# Altium PCB tcpcontrol.pcbdoc (part 1 of 2)
Units mil, origin at the board's own origin, x right, y up, seen from the top; angles counter-clockwise.
Board outline 4775.59 x 3409.45 mil, 2 copper layers (Top Layer, Bottom Layer); 217 components, 170 nets, 747 pads, 138 vias.
Unrouted connection lines stored in the file: 74.
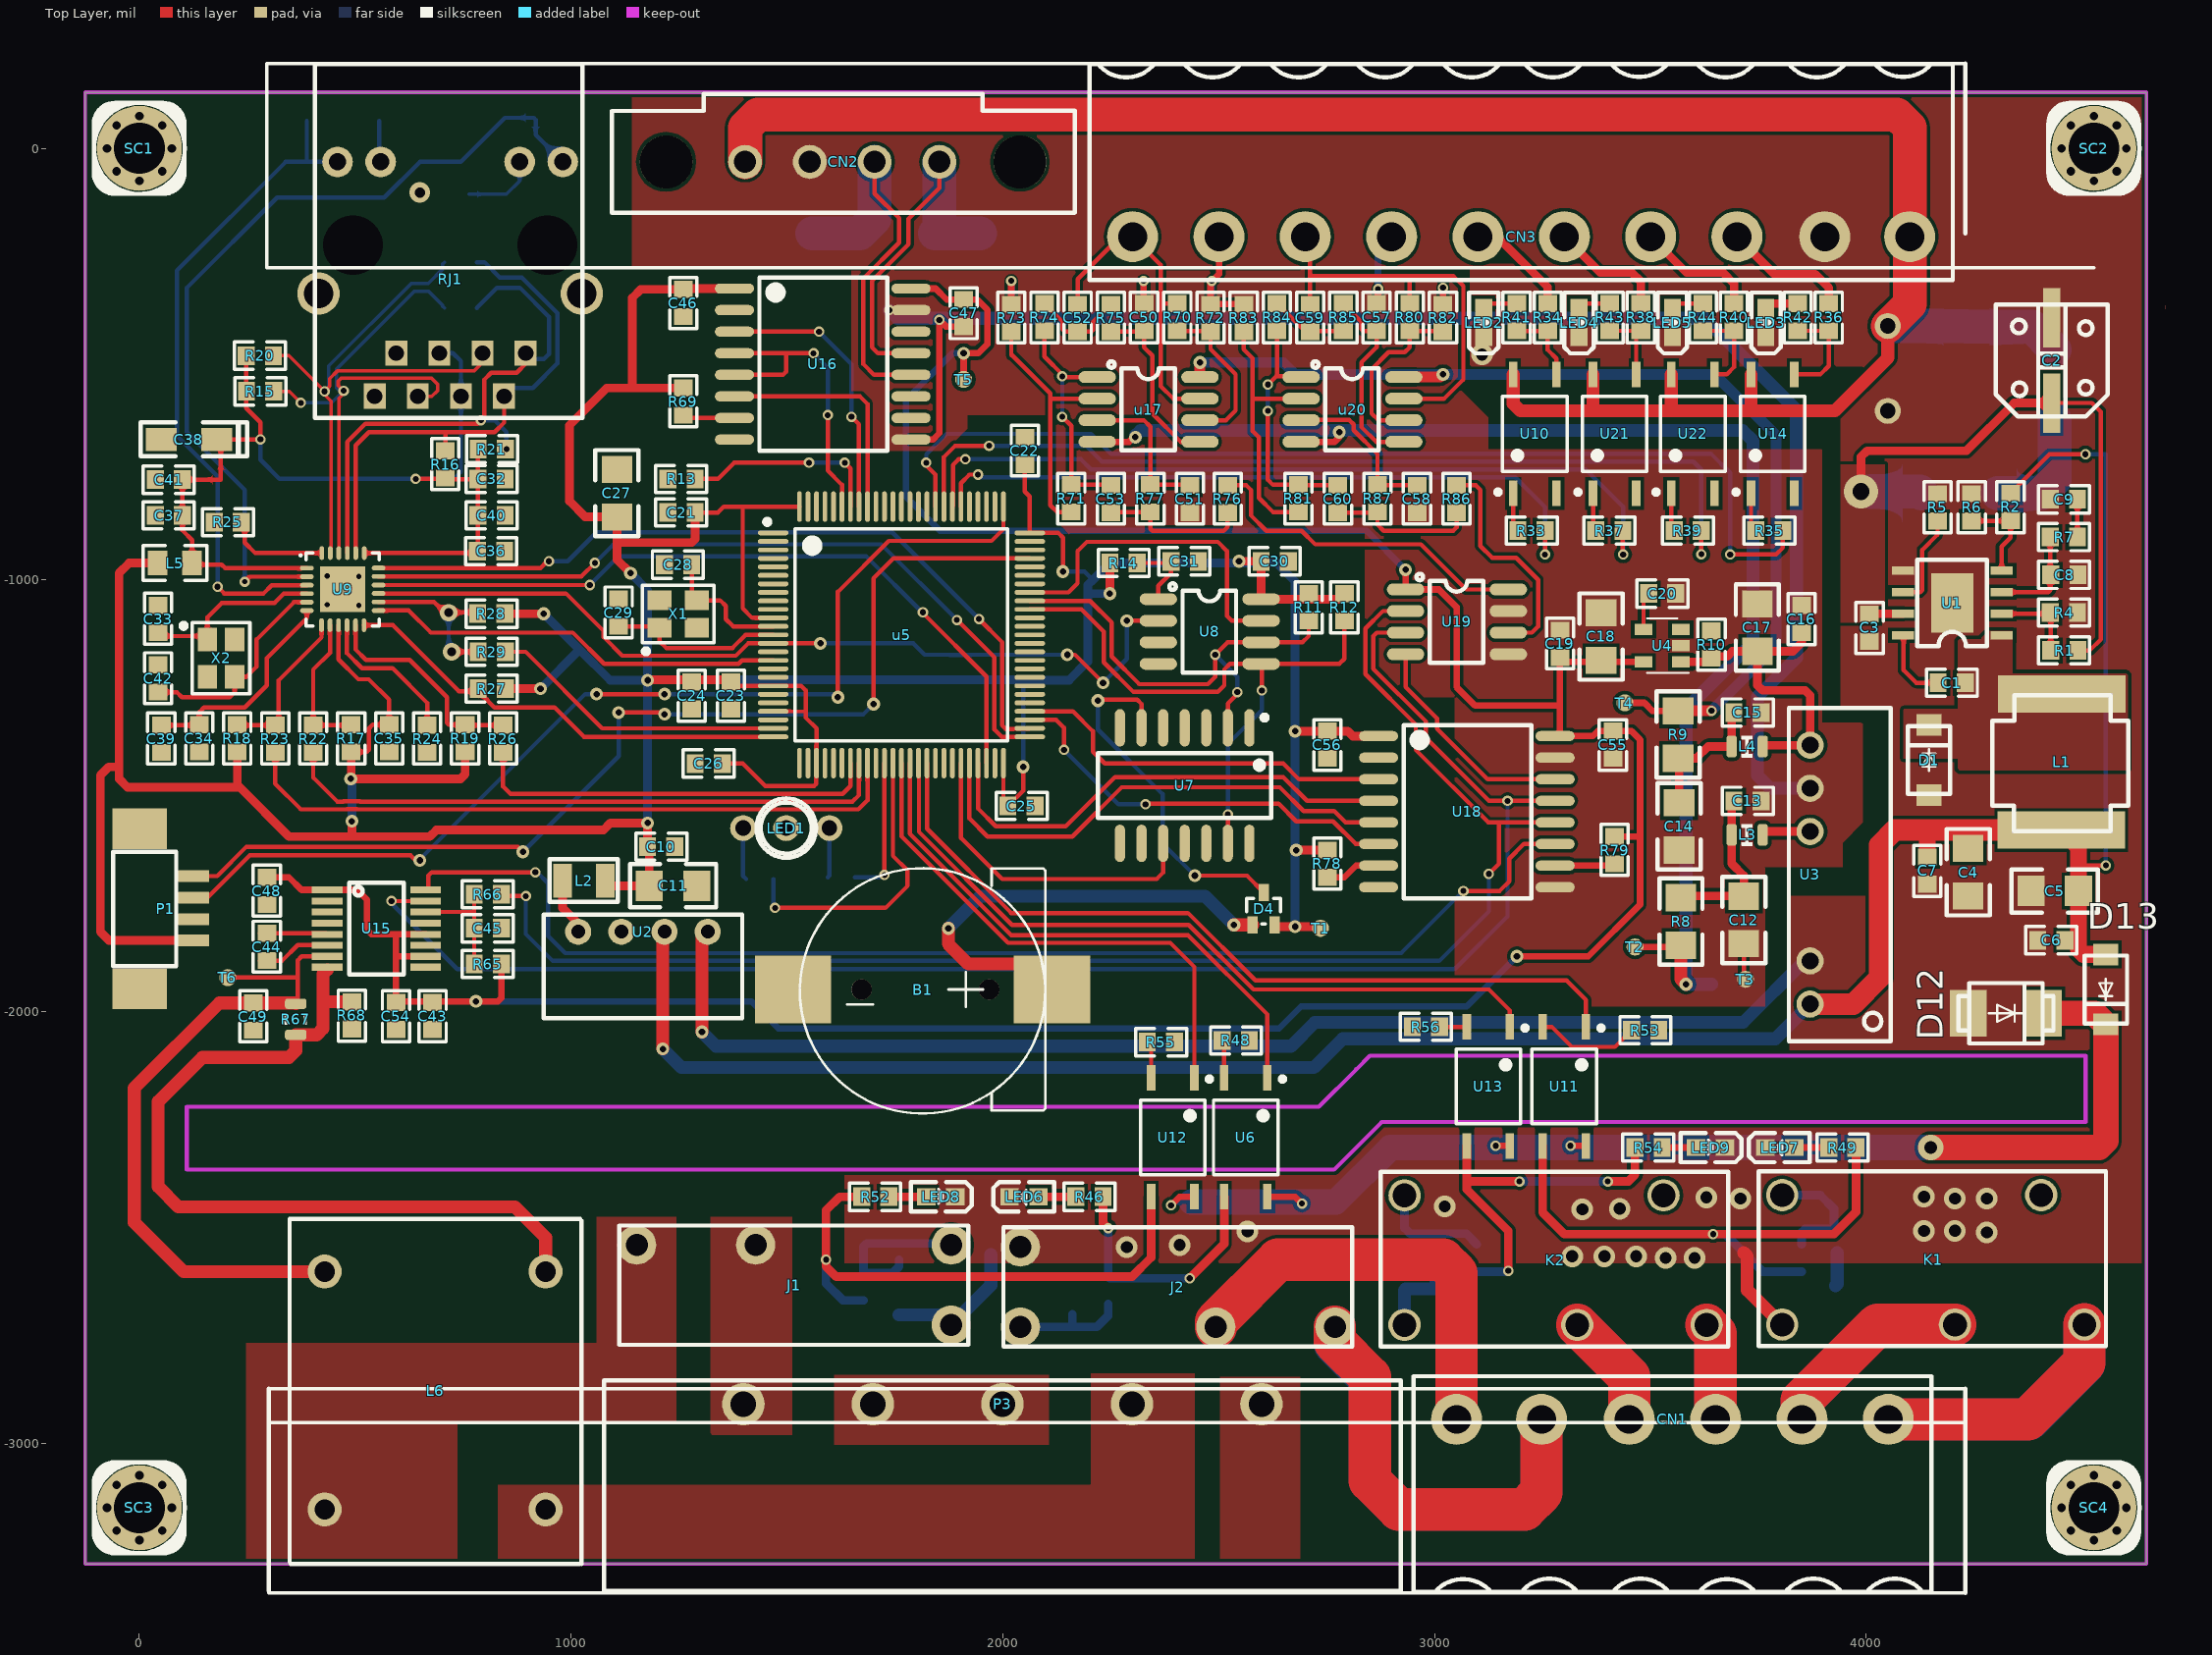
[diagram p0: Top Layer view]
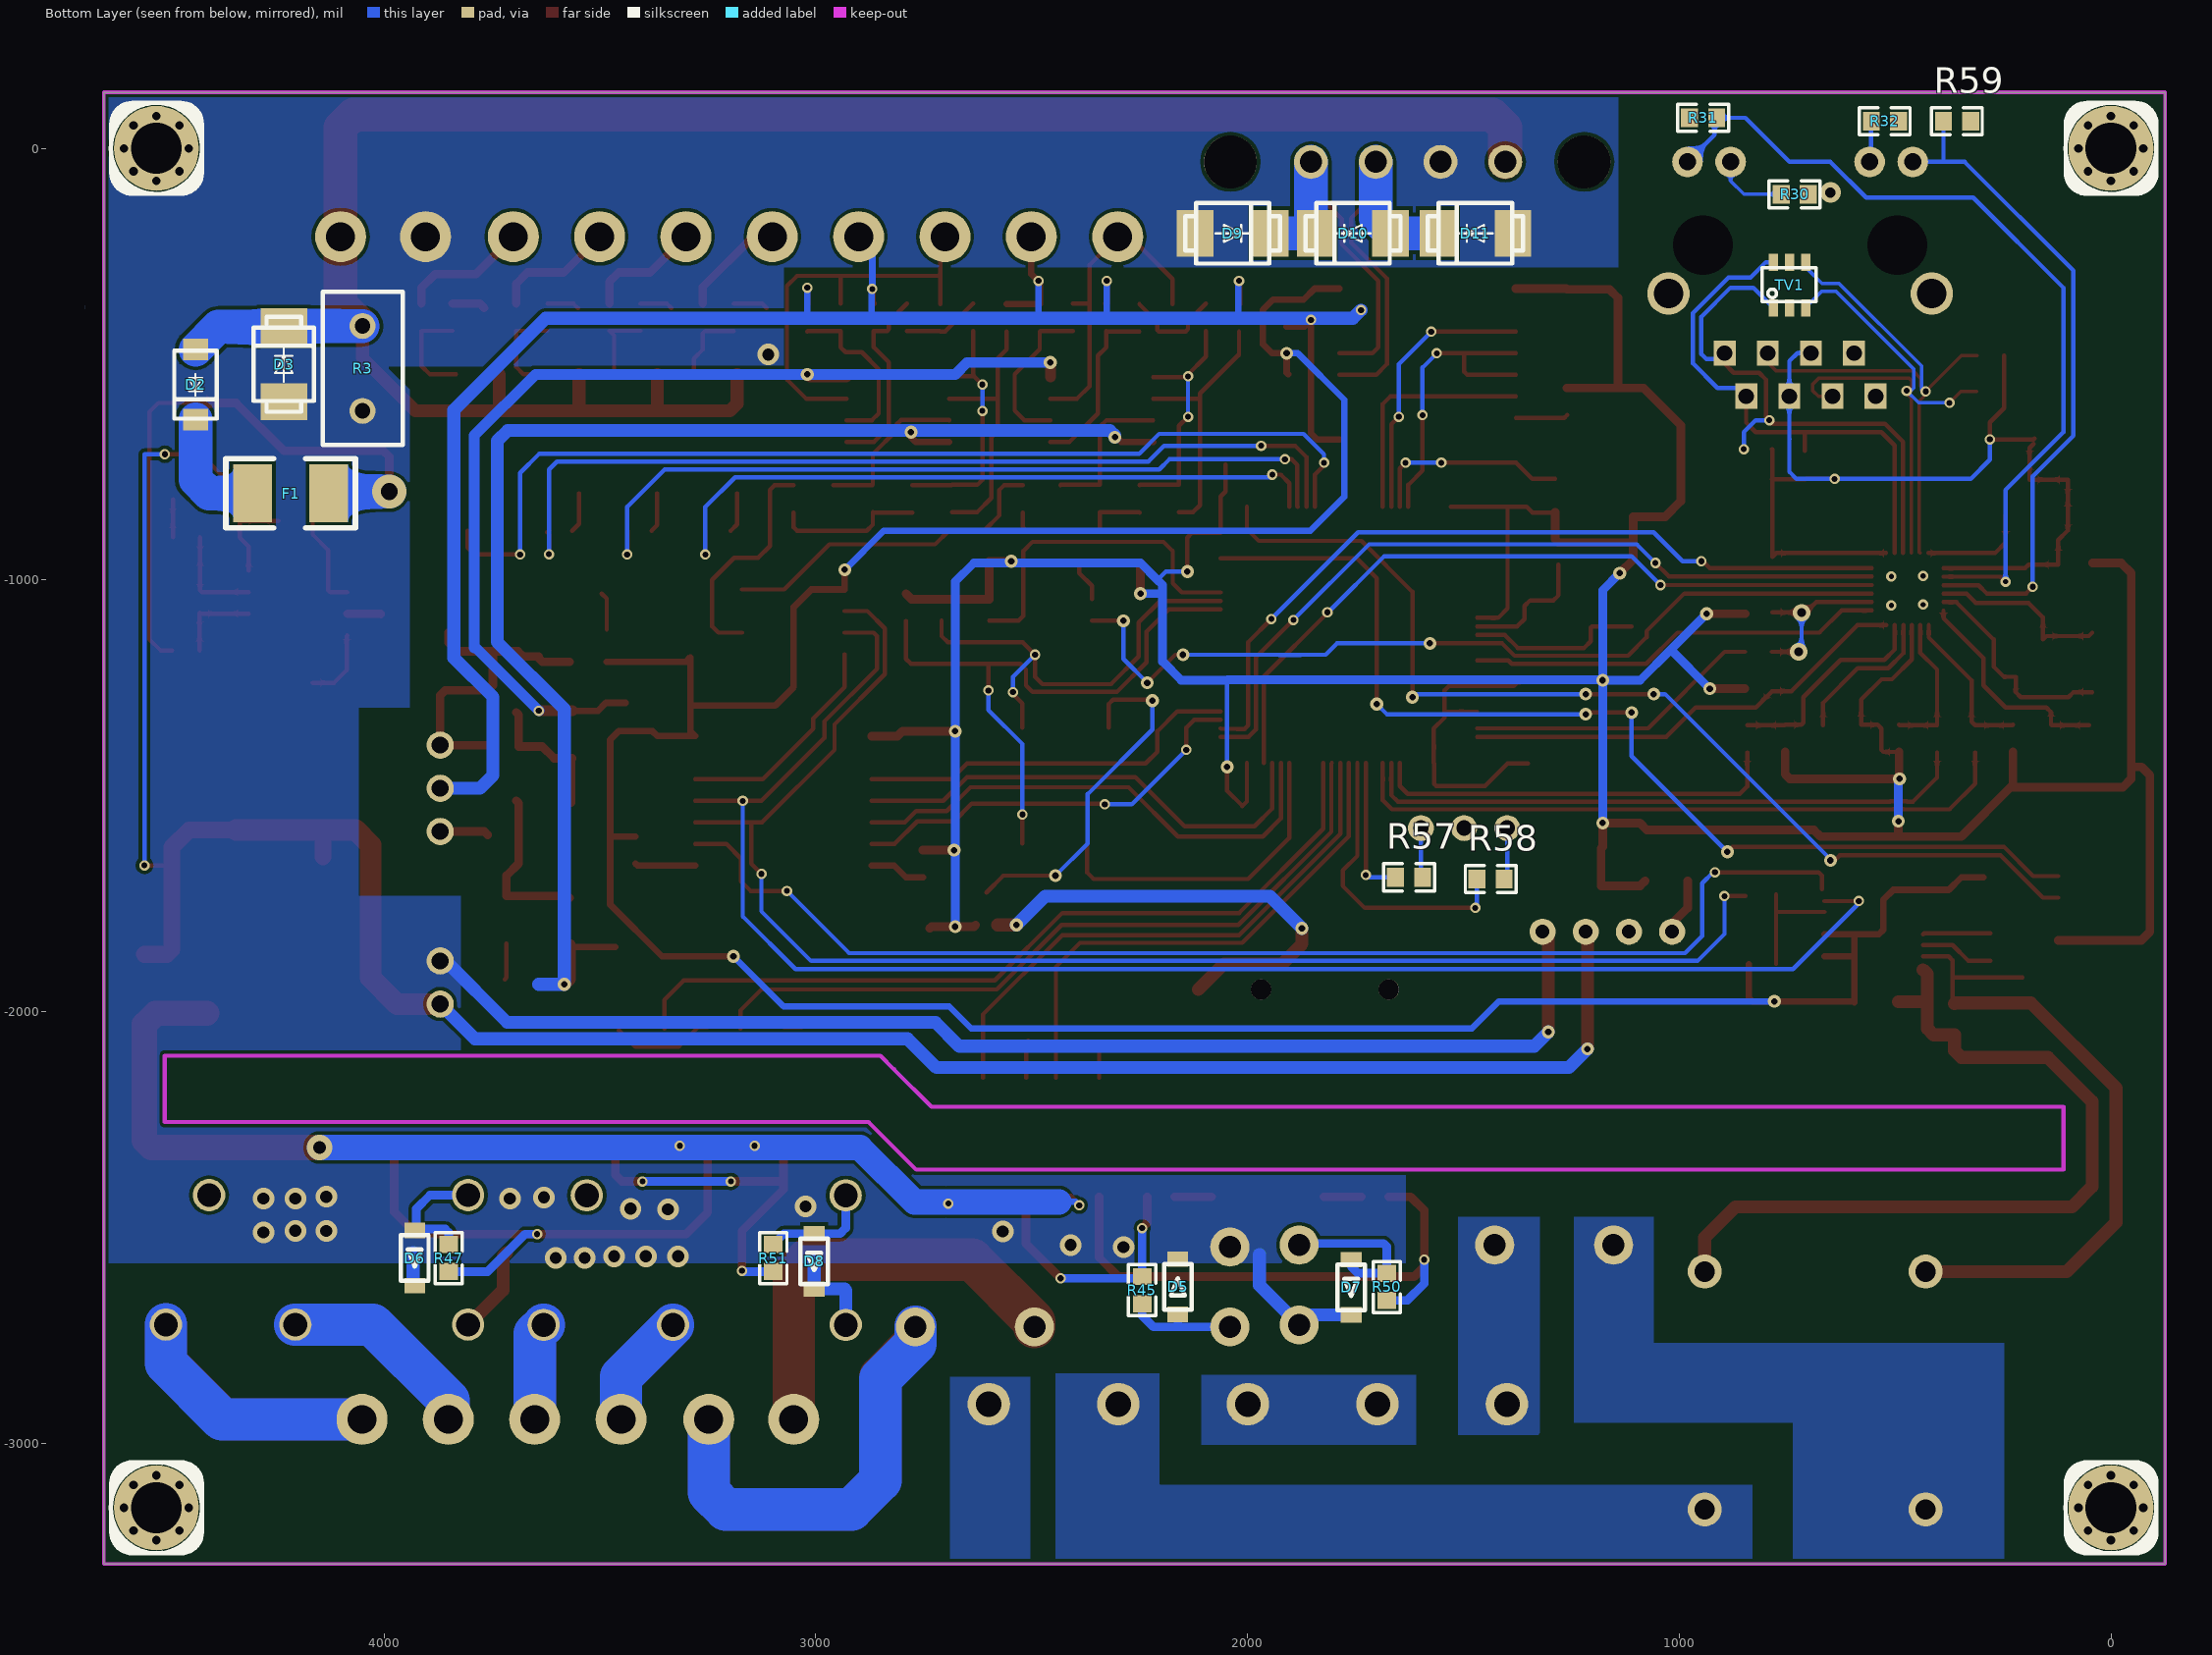
[diagram p1: Bottom Layer view, seen from below]
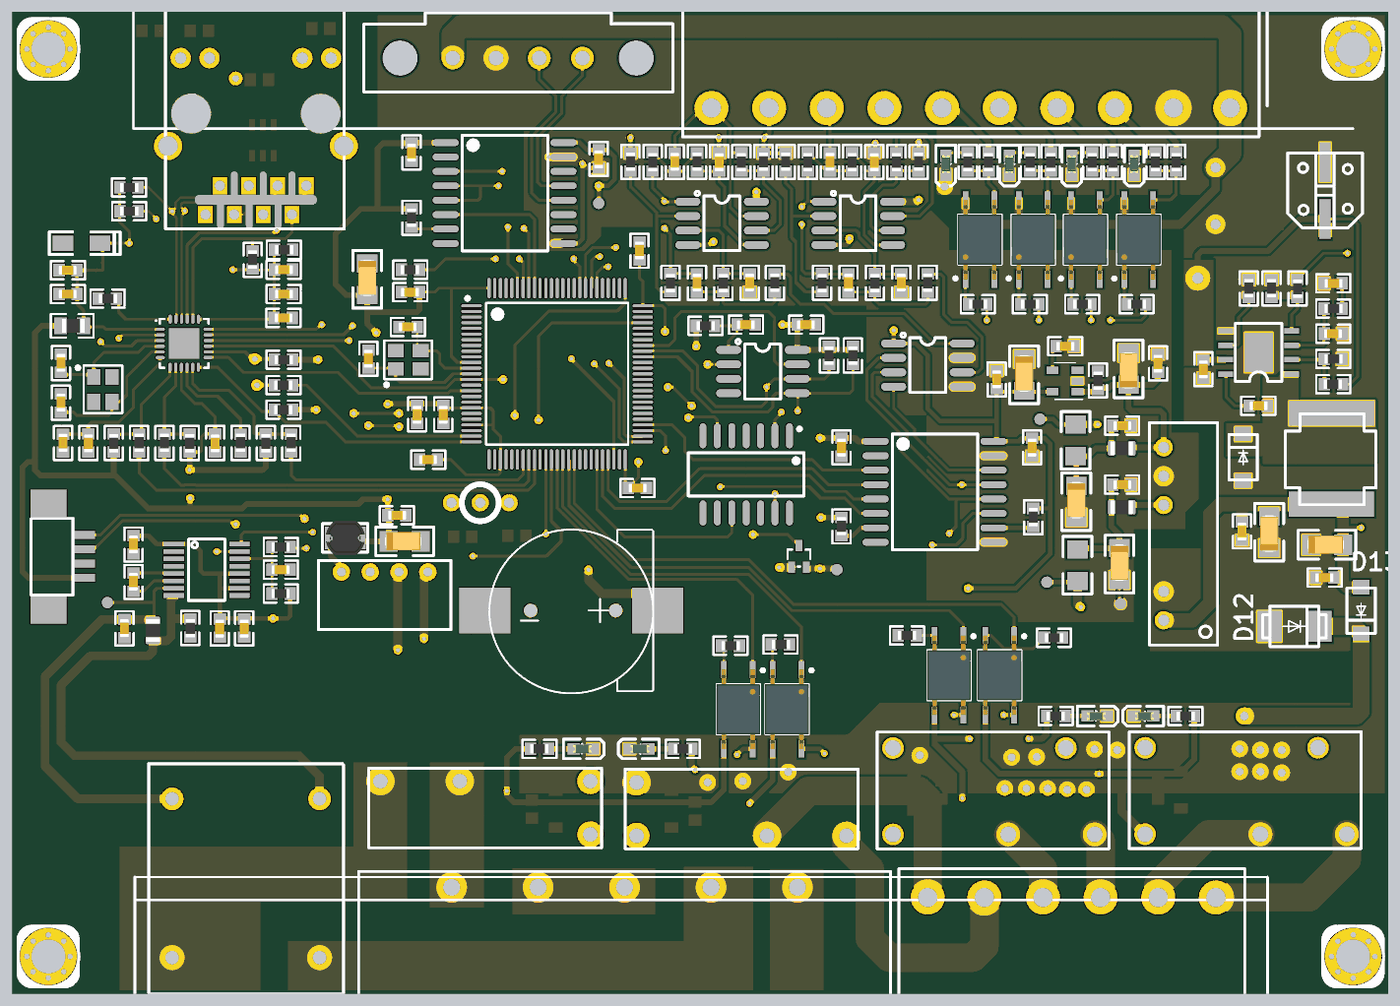
[diagram p3: 3D render of the assembled board from above, using the file's embedded part models]

## Layer stack, top to bottom
Top Solder: solder mask 0.4, Solder Resist, Dk 3.5
Top Layer: signal copper 1.4
Dielectric1: dielectric 12.6, FR-4, Dk 4.8
Bottom Layer: signal copper 1.4
Bottom Solder: solder mask 0.4, Solder Resist, Dk 3.5

## Board outline
-125.98,-3279.53 4649.61,-3279.53 4649.61,129.92 -125.98,129.92

## Design rules (kind name [scope] priority, off if disabled: settings)
Clearance [All] p1: gap=8 ignorepadtopadclearanceinfootprint=TRUE
DiffPairsRouting [All] p1: maxlimit=10 minlimit=8 mostfreqgap=10 toplayer_minwidth=8 toplayer_maxwidth=15 toplayer_prefwidth=10 bottomlayer_minwidth=8 bottomlayer_maxwidth=15 bottomlayer_prefwidth=10 maxuncoupledlength=500
MatchedLengths "Schematic Matched Net Lengths_3" [InNet('TD_P')] p1: tolerance=100 checknetsindiffpair=TRUE checkdiffpairvsdiffpair=FALSE checkxsignals=FALSE checkothers=FALSE
MatchedLengths "Schematic Matched Net Lengths_2" [InNet('TD_N')] p2: tolerance=100 checknetsindiffpair=TRUE checkdiffpairvsdiffpair=FALSE checkxsignals=FALSE checkothers=FALSE
MatchedLengths "Schematic Matched Net Lengths_1" [InNet('RD_P')] p3: tolerance=100 checknetsindiffpair=TRUE checkdiffpairvsdiffpair=FALSE checkxsignals=FALSE checkothers=FALSE
MatchedLengths "Schematic Matched Net Lengths" [InNet('RD_N')] p4: tolerance=100 checknetsindiffpair=TRUE checkdiffpairvsdiffpair=FALSE checkxsignals=FALSE checkothers=FALSE
PlaneConnect [All] p1: planeconnectstyle=Direct reliefexpansion=20 reliefentries=4 reliefconductorwidth=10 reliefairgap=10
PolygonConnect [All] p1: connectstyle=Direct reliefconductorwidth=10 reliefentries=4 polygonreliefangle="90 Angle" airgapwidth=10
RoutingVias [All] p1: holewidth=28 width=50 viastyle="Through Hole" minholewidth=10 minwidth=20 maxholewidth=28 maxwidth=50
SolderMaskExpansion [All] p1: expansion=4
Width [All] p1: maxlimit=157.48 minlimit=8 preferedwidth=10
28 further rules are at their usual default settings.

## Classes and differential pairs
component class U_Power: C1 C2 C3 C4 C5 C6 C7 C8 C9 C10 C11 C12 C13 C14 C15 C16 C17 C18 C19 C20 D1 D2 D3 F1 L1 L2 L3 L4 R1 R2 R3 R4 R5 R6 R7 R8 R9 R10 T1 T2 T3 T4 T5 U1 U2 U3 U4
component class U_output: C43 C44 C45 C46 C47 C48 C49 C50 C51 C52 C53 C54 C55 C56 C57 C58 C59 C60 CN2 D9 D10 D11 L6 R65 R66 R67 R68 R69 R70 R71 R72 R73 R74 R75 R76 R77 R78 R79 R80 R81 R82 R83 R84 R85 R86 R87 T6 U15 U16 u17 U18 u18 U19 u20
component class U_lelay: CN1 CN3 D5 D6 D7 D8 D12 D13 J1 J2 K1 K2 LED2 LED3 LED4 LED5 LED6 LED7 LED8 LED9 P3 Q5 Q6 Q7 Q8 R33 R34 R35 R36 R37 R38 R39 R40 R41 R42 R43 R44 R45 R46 R47 R48 R49 R50 R51 R52 R53 R54 R55 R56 U6 U10 U11 U12 U13 U14 U21 U22
component class U_Ethernet: C32 C33 C34 C35 C36 C37 C38 C39 C40 C41 C42 L5 R15 R16 R17 R18 R19 R20 R21 R22 R23 R24 R25 R26 R27 R28 R29 R30 R31 R32 R59 RJ1 TV1 U9 X2
component class U_cpu: B1 C21 C22 C23 C24 C25 C26 C27 C28 C29 C30 C31 D4 LED1 P1 R11 R12 R13 R14 R57 R58 SC1 SC2 SC3 SC4 u5 U7 U8 X1
differential pair TD: +TD_P -TD_N
differential pair RD: +RD_P -RD_N

## Components (designator, comment, footprint, x,y, rotation, side; value= is the part's Value field where it differs from the comment)
B1 "CR1220-2" BATTERY-2 2114.23,-1948.82 r180 top locked
C1 "100nF" "0603 - cap" 4230,-1238.2 r180 top
C2 "4.7uF" CAP-6.3*5.4 4430,-490 r180 top
C3 "100nF" "0603 - cap" 4007.87,-1142.34 r90 top
C4 "4.7uF" "1206 - cap" 4236.22,-1677.05 r90 top
C5 "22uF(226)" "1206 - cap" 4437.01,-1720.47 r0 top
C6 "100nF" "0603 - cap" 4397.03,-1834.65 r0 top
C7 "100nF" "0603 - cap" 4141.73,-1705.33 r90 top
C8 "1PF" "0603 - cap" 4427.01,-988.2 r0 top
C9 "330PF" "0603 - cap" 4490,-813.2 r180 top
C10 "100nF" "0603 - cap" 1240.76,-1618.11 r180 top
C11 "10uF" "1206 - cap" 1236.22,-1708.66 r0 top
C12 "10uF" "1206 - cap" 3716.54,-1787.52 r270 top
C13 "100nF" "0603 - cap" 3757.33,-1511.81 r180 top
C14 "10uF" "1206 - cap" 3566.93,-1570.98 r270 top
C15 "100nF" "0603 - cap" 3757.33,-1307.09 r180 top
C16 "100nF" "0603 - cap" 3850.39,-1122.65 r90 top
C17 "2.2uF" "1206 - cap" 3748.03,-1110.35 r90 top
C18 "2.2uF" "1206 - cap" 3385.83,-1131.16 r270 top
C19 "100nF" "0603 - cap" 3290.71,-1115.59 r270 top
C20 "470pF" "0603 - cap" 3559.66,-1031.5 r180 top
C21 "100nF" "0603 - cap" 1223.8,-843.73 r0 top
C22 "100nF" "0603 - cap" 2051.18,-668.69 r270 top
C23 "100nF" "0603 - cap" 1370.08,-1299.81 r90 top
C24 "100nF" "0603 - cap" 1279.53,-1299.81 r90 top
C25 "100nF" "0603 - cap" 2075.4,-1523.62 r180 top
C26 "100nF" "0603 - cap" 1286.79,-1425.2 r0 top
C27 "2.2uF" "1206 - cap" 1106.3,-798.99 r270 top
C28 "12pF" "0603 - cap" 1215.93,-964.57 r0 top
C29 "12pF" "0603 - cap" 1110.24,-1043.89 r270 top
C30 "100nf" "0603 - cap" 2597.82,-956.69 r0 top
C31 "100nf" "0603 - cap" 2389.16,-956.69 r0 top
C32 "100nF" "0603 - cap" 847.91,-765.87 r180 top
C33 "12pF" "0603 - cap" 43.31,-1058.45 r270 top
C34 "470pF" "0603 - cap" 138.73,-1398.99 r90 top value=100nF
C35 "100nF" "0603 - cap" 578.61,-1398.99 r90 top
C36 "100nF" "0603 - cap" 846.7,-933.07 r180 top
C37 "100nF" "0603 - cap" 36.28,-850.39 r0 top
C38 "10uF" CASE-A_3216 110.24,-673.23 r180 top
C39 "1uF_X5R_0603" "0603 - cap" 50.75,-1336 r270 top value=1礔
C40 "100nF" "0603 - cap" 847.91,-850.39 r180 top
C41 "100nF" "0603 - cap" 36.28,-767.72 r0 top
C42 "12pF" "0603 - cap" 43.31,-1196.25 r270 top
C43 "100nF" "0603 - cap" 679.28,-2042.34 r90 top
C44 "100nF" "0603 - cap" 295.28,-1818.3 r270 top
C45 "100nF" "0603 - cap" 774.98,-1807.09 r0 top
C46 "100nF" "0603 - cap" 1259.84,-390.36 r90 top
C47 "100nF" "0603 - cap" 1909.45,-413.39 r90 top
C48 "100nF" "0603 - cap" 295.28,-1688.37 r270 top
C49 "100nF" "0603 - cap" 263.78,-1979.35 r270 top
C50 "10nF" "0603 - cap" 2327.38,-423.49 r90 top
C51 "10nF" "0603 - cap" 2433.53,-780.13 r270 top
C52 "10nF" "0603 - cap" 2173.53,-360.5 r270 top
C53 "10nF" "0603 - cap" 2250.31,-780.13 r270 top
C54 "100nF" "0603 - cap" 594.49,-2042.34 r90 top
C55 "100nF" "0603 - cap" 3413.39,-1413.99 r90 top
C56 "100nF" "0603 - cap" 2751.97,-1413.99 r90 top
C57 "10nF" "0603 - cap" 2865.84,-423.49 r90 top
C58 "10nF" "0603 - cap" 2959.57,-780.13 r270 top
C59 "10nF" "0603 - cap" 2711.99,-360.5 r270 top
C60 "10nF" "0603 - cap" 2776.35,-780.13 r270 top
CN1 "WJ142V-5.08-6P" 5.08_6P 3551.18,-2944.88 r0 top locked
CN2 "WJ15EDGRM-3.81-4P-14-00A" 3.84-4p 1629.92,-31.41 r0 top
CN3 "WJ2EDGRC-5.08-10P" WJ2EDGRC-5.08-10P 3200.79,-204.72 r180 top locked
D1 "B340A-13-F" SMA(DO-214AC) 4145.67,-1413.27 r90 top
D2 "SS54" SMA(DO-214AC) 4437.01,-551.18 r270 bottom
D3 "SMBJ30CA" SMB(DO-214AA) 4232.28,-497.39 r90 bottom
D4 "LBAT54CWT1G" SC-70(SC-70-3) 2629.92,-1799.21 r0 top
D5 "1N4007W" SOD-123FL 2161.42,-2637.8 r270 bottom
D6 "1N4007W" SOD-123FL 3929.13,-2570.87 r90 bottom
D7 "1N4007W" SOD-123FL 1759.84,-2638.8 r90 bottom
D8 "1N4007W" SOD-123FL 3003.94,-2578.74 r90 bottom
D9 "SMBJ6.5CA" SMB(DO-214AA) 2031.5,-196.85 r180 bottom
D10 "SMBJ6.5CA" SMB(DO-214AA) 1758.52,-196.85 r0 bottom
D11 "SMBJ6.5CA" SMB(DO-214AA) 1475.06,-196.85 r0 bottom
D12 "SMBJ6.5CA" SMB(DO-214AA) 4326.77,-2003.94 r0 top
D13 "SS54" SMA(DO-214AC) 4555.12,-1952.76 r270 top
F1 "SMD1812P150TF/24" 1812 4216.54,-799.21 r180 bottom
J1 "G5NB-1A-E-DC5V" G5NB-1A-E-DC5V 1480.32,-2625.98 r180 top locked
J2 "G5NB-1A-E-DC5V" G5NB-1A-E-DC5V 2440.94,-2645.67 r0 top locked
K1 "JQ1P-5V-F" JQ1P-5V-F 3805.51,-2725.2 r0 top locked
K2 "JQ1P-5V-F" JQ1P-5V-F 2930.61,-2725.88 r0 top locked
L1 "10uH" 8040 4450,-1421.9 r270 top
L2 "18uH" 1220 1029.51,-1696.85 r0 top
L3 "22uH" IND_0805 3724.41,-1590.55 r180 top
L4 "22uH" IND_0805 3724.41,-1385.83 r180 top
L5 "330Ω" "0805 - res" 122.05,-960.63 r180 top
L6 "TA1005-2M" TA1005-2M 680.94,-2873.56 r180 top locked
LED1 "3ARG9HWA(红翠绿)" led3 1498.43,-1574.8 r180 top locked
LED2 "19-217/GHC-YR1S2/3T" LED-0603 3114.17,-370.01 r270 top
LED3 "19-217/GHC-YR1S2/3T" LED-0603 3767.72,-370.01 r270 top
LED4 "19-217/GHC-YR1S2/3T" LED-0603 3334.65,-370.01 r270 top
LED5 "19-217/GHC-YR1S2/3T" LED-0603 3551.18,-370.01 r270 top
LED6 "19-217/GHC-YR1S2/3T" LED-0603 2082.75,-2429.13 r180 top
LED7 "19-217/GHC-YR1S2/3T" LED-0603 3833.46,-2314.96 r180 top
LED8 "19-217/GHC-YR1S2/3T" LED-0603 1822.83,-2429.13 r0 top
LED9 "19-217/GHC-YR1S2/3T" LED-0603 3606.19,-2314.96 r0 top
P1 "1.25T-4PWT" 1.25T-4PWT 120.45,-1689.22 r90 top
P3 "Header 5" 5p-7.62 1999.21,-2909.45 r0 top locked
R1 "100KΩ" 0603-res 4427.01,-1163.2 r0 top
R2 "20KΩ" 0603-res 4334.4,-862.59 r90 top
R3 "07D330K" PS-RES-9*4.7 4050,-510 r90 bottom
R4 "18KΩ" 0603-res 4490,-1075.7 r180 top
R5 "200k" 0603-res 4165.35,-799.6 r270 top
R6 "3.8KΩ" 0603-res 4244.4,-799.6 r270 top
R7 "127K" 0603-res 4490,-900.7 r180 top
R8 "100r" 1206-res 3570.87,-1791.34 r270 top
R9 "100r" 1206-res 3564.3,-1358.27 r90 top
R10 "1KΩ" 0603-res 3641.73,-1181.71 r90 top
R11 "470r" 0603-res 2708.66,-1095.09 r90 top
R12 "470r" 0603-res 2791.34,-1095.29 r90 top
R13 "10k" 0603-res 1223.8,-765.87 r0 top
R14 "10k" 0603-res 2311.62,-960.63 r180 top
R15 "50" 0603-res 311.62,-562.99 r180 top
R16 "50" 0603-res 708.66,-700.19 r270 top
R17 "10K" 0603-res 490.63,-1398.99 r90 top
R18 "10K" 0603-res 226.7,-1398.99 r90 top
R19 "10K" 0603-res 754.56,-1398.99 r90 top
R20 "50" 0603-res 311.02,-480.32 r180 top
R21 "50" 0603-res 848.51,-696.85 r180 top
R22 "33" 0603-res 402.65,-1336 r270 top
R23 "33" 0603-res 314.68,-1336 r270 top
R24 "10K" 0603-res 666.58,-1336 r270 top
R25 "12K1" 0603-res 236.83,-866.14 r180 top
R26 "33" 0603-res 842.54,-1336 r270 top
R27 "1K5" 0603-res 784.31,-1251.97 r0 top
R28 "10K" 0603-res 847.31,-1078.2 r180 top
R29 "33" 0603-res 784.31,-1166.51 r0 top
R30 "270" 0603-res 764.38,-106.3 r180 bottom value=10K
R31 "10K" 0603-res 912.79,70.87 r0 bottom
R32 "270" 0603-res 555.72,62.99 r180 bottom value=10K
R33 "510Ω" 0603-res 3256.66,-885.83 r180 top
R34 "100Ω" 0603-res 3262.3,-423.49 r90 top
R35 "510Ω" 0603-res 3807.69,-885.83 r180 top
R36 "100Ω" 0603-res 3913.39,-423.49 r90 top
R37 "510Ω" 0603-res 3437.01,-885.83 r180 top
R38 "100Ω" 0603-res 3478.01,-423.49 r90 top
R39 "510Ω" 0603-res 3618.72,-885.83 r180 top
R40 "100Ω" 0603-res 3693.73,-423.49 r90 top
R41 "1KΩ" 0603-res 3190.39,-423.49 r90 top
R42 "1KΩ" 0603-res 3841.48,-423.49 r90 top
R43 "1KΩ" 0603-res 3406.11,-423.49 r90 top
R44 "1KΩ" 0603-res 3621.82,-423.49 r90 top
R45 "50Ω" 0603-res 2244.09,-2613.57 r270 bottom
R46 "1KΩ" 0603-res 2232.88,-2429.13 r180 top
R47 "50Ω" 0603-res 3850.39,-2602.96 r90 bottom
R48 "510Ω" 0603-res 2571.86,-2066.93 r180 top
R49 "1KΩ" 0603-res 3976.98,-2314.96 r180 top
R50 "50Ω" 0603-res 1677.17,-2669.9 r90 bottom
R51 "50Ω" 0603-res 3098.43,-2602.97 r90 bottom
R52 "1KΩ" 0603-res 1672.62,-2429.13 r0 top
R53 "510Ω" 0603-res 3520.28,-2043.31 r180 top
R54 "1KΩ" 0603-res 3463.97,-2314.96 r0 top
R55 "510Ω" 0603-res 2398.24,-2070.87 r180 top
R56 "510Ω" 0603-res 2948.22,-2035.43 r0 top
R57 "470r" 0603-res 1593.89,-1688.98 r0 bottom
R58 "470r" 0603-res 1404.91,-1692.91 r0 bottom
R59 "10K" 0603-res 388.54,62.99 r180 bottom
R65 "10k" 0603-res 774.98,-1889.76 r0 top
R66 "1k" 0603-res 774.98,-1728.35 r0 top
R67 "R0805" RES_0805 362.2,-2017.84 r90 top value=30
R68 "0" 0603-res 492.13,-2041.07 r90 top
R69 "1k" 0603-res 1259.84,-554.51 r270 top
R70 "13k" 0603-res 2404.3,-423.49 r90 top
R71 "10k" 0603-res 2158.7,-843.12 r90 top
R72 "20k" 0603-res 2481.22,-360.5 r270 top
R73 "10k" 0603-res 2019.69,-360.5 r270 top
R74 "51k" 0603-res 2096.61,-423.49 r90 top
R75 "51k" 0603-res 2250.45,-360.5 r270 top
R76 "51k" 0603-res 2520.87,-780.13 r270 top
R77 "240k" 0603-res 2341.92,-843.12 r90 top
R78 "100r" 0603-res 2751.97,-1625.38 r270 top
R79 "100r" 0603-res 3417.32,-1593.88 r270 top
R80 "13k" 0603-res 2942.76,-423.49 r90 top
R81 "10k" 0603-res 2684.74,-843.12 r90 top
R82 "20k" 0603-res 3019.68,-360.5 r270 top
R83 "10k" 0603-res 2558.15,-360.5 r270 top
R84 "51k" 0603-res 2635.07,-423.49 r90 top
R85 "51k" 0603-res 2788.92,-423.49 r90 top
R86 "51k" 0603-res 3051.18,-780.13 r270 top
R87 "240k" 0603-res 2867.96,-843.12 r90 top
RJ1 "RJ45" RJ45 719.88,-302.41 r0 top locked
SC1 "M3" 安装孔(3mm) 0,0 r0 top locked
SC2 "M3" 安装孔(3mm) 4527.56,0 r0 top locked
SC3 "M3" 安装孔(3mm) 0,-3149.61 r0 top locked
SC4 "M3" 安装孔(3mm) 4527.56,-3149.61 r0 top locked
T1 "TP" tp 2736.22,-1807.09 r0 top
T2 "TP" tp 3464.57,-1850.39 r0 top
T3 "TP" tp 3720.47,-1925.2 r0 top
T4 "TP" tp 3440.94,-1284.7 r0 top
T5 "TP" tp 1909.45,-535.43 r0 top
T6 "TP" tp 204.72,-1921.26 r90 top
TV1 "SRV05-4.TCT" SOT-23-6 781.49,-370.08 r90 bottom
U1 "mp2467" ESOP-8-EP 4199.4,-1053.2 r90 top
U2 "B0503S-1WR3" B0505S-1WR2 1321.54,-1814.96 r90 top
U3 "E0515S-1WR3" E0515S-1WR3 3870.08,-1682.68 r90 top
U4 "SPX5205M5-L-5-0/TR" SOT-23-5 3570.86,-1189.56 r180 top
u5 "stm32f407" LQFP-100_14X14X05P 1529.08,-829.96 r0 top locked
U6 "TLP187(TPL,E(T" TLP187 2562.99,-2291.34 r270 top
U7 "RX8025T-UB" SOP-14_208MIL 2571.26,-1342.48 r270 top locked
U8 "CAT1025WI-30-GT3" SOIC-8_150MIL 2385.43,-1044.49 r0 top
U9 "LAN8742AI-CZ" QFN-24_4X4X05P 395.94,-976.69 r0 top
U10 "TLP187(TPL,E(T" TLP187 3232.28,-661.42 r90 top
U11 "TLP187(TPL,E(T" TLP187 3300.79,-2173.23 r270 top
U12 "TLP187(TPL,E(T" TLP187 2393.7,-2291.34 r270 top
U13 "TLP187(TPL,E(T" TLP187 3124.8,-2173.23 r270 top
U14 "TLP187(TPL,E(T" TLP187 3783.46,-661.42 r90 top locked
U15 "ADS1230IPWR" TSSOP-16 547.24,-1811.02 r0 top locked
U16 "ADM2483BRWZ-REEL" SOIC-16_300MIL 1758.4,-674.83 r0 top
u17 "tl802t" SOIC-8_150MIL 2243.69,-529.92 r0 top locked
U18 "ADUM2401BRWZ-RL" SOIC-16_300MIL 3250.53,-1711.81 r0 top
U19 "MCP4822-E/SN" SOIC-8_150MIL 2958.07,-1022.05 r0 top
u20 "tl802t" SOIC-8_150MIL 2716.13,-529.92 r0 top locked
U21 "TLP187(TPL,E(T" TLP187 3417.32,-661.42 r90 top
U22 "TLP187(TPL,E(T" TLP187 3598.43,-661.42 r90 top locked
X1 "25MHz" OSC-YSX-3225_4P 1291.35,-1047.24 r90 top
X2 "25MHz" OSC-YSX-3225_4P 220.48,-1224.42 r0 top

## Footprints (in the part's own frame and the unit in brackets; to place one, negate y for a bottom-side part, rotate by r counter-clockwise, add the part's x,y. Pads: shape width x height; smd on the part's side, far side on the other; paste and mask are expansions set on the pad)
1.25T-4PWT [mm]
  rect 2.4x3.2 smd: 0(-6.553,3.051) 0(2.857,3.053)
  rect 0.7x2 smd: 1(-3.711,-0.038) 2(-2.461,-0.038) 3(-1.194,-0.041) 4(0.079,-0.041)
  silkscreen extent -5.22,0.89 1.52,4.59
3.84-4p [mm]
  round 2 hole 1.3: 1(-5.759,0) 2(-1.949,0) 3(1.861,0) 4(5.671,0)
  round 3.1 hole 3.1 unplated: ""(-10.41,0) ""(10.41,0)
  silkscreen extent -13.59,-3 13.63,4
5.08_6P [mm]
  round 3 hole 1.7: 1(-12.7,0) 2(-7.701,0) 3(-2.54,0) 4(2.54,0) 5(7.62,0) 6(12.7,0)
  silkscreen extent -15.24,-10.16 15.24,2.54
5p-7.62 [mm]
  round 2.5 hole 1.5: 1(-15.24,0) 2(-7.62,0) 3(0,0) 4(7.62,0) 5(15.24,0)
  silkscreen extent -23.44,-11 23.44,1.4
"0603 - cap" [mm]
  rect 1x1.1 smd: 1(0.015,0) 2(1.615,0)
  silkscreen extent -0.7,-0.8 2.3,0.8, body extent -0.02,-0.4 1.58,0.4, height 0.8
0603-res [mm]
  rect 1x1.1 smd: 1(0.015,0) 2(1.615,0)
  silkscreen extent -0.7,-0.8 2.3,0.8, body extent -0.02,-0.4 1.58,0.4, height 0.45
"0805 - res" [mm]
  rect 1.16x1.47 smd: 1(0,0) 2(2.032,0)
  silkscreen extent -0.88,-1.04 2.89,1.04, body extent -0.09,-0.62 1.91,0.63, height 0.6
"1206 - cap" [mil]
  rect 63x70.9 smd: 1(-55,0) 2(55,0)
  silkscreen extent -100,-50 100,50, body extent -68,-31 58,32, height 71
1206-res [mil]
  rect 63x70.9 smd: 1(-55,0) 2(55,0)
  silkscreen extent -100,-50 100,50
1220 [mm]
  rect 1.1x2 smd: 1(-1.251,0) 2(1.251,0)
  silkscreen extent -2.01,-1.24 2.01,1.27, body extent -1.7,-1.5 1.74,1.5, height 2.1
1812 [mil]
  rect 90x133.86 smd: 1(-88,0) 2(88,0)
  silkscreen extent -150,-80 150,80
8040 [mil]
  rect 86.61x295.27 smd: 1(-157.5,3) 2(157.5,2)
  silkscreen extent -155,-158 160,157
B0505S-1WR2 [mil]
  round 60.5 hole 32: 1(0,5) 2(0,105) 3(0,205) 4(0,305)
  silkscreen extent -200,-75 40,385
BATTERY-2 [mm]
  round 1.2 hole 1.2: 0(3.708,0) 0(11.201,0)
  rect 4.5x4 smd: 1(0,0) 2(15.24,0)
  silkscreen extent 0.4,-7.14 14.84,7.3
CAP-6.3*5.4 [mm]
  rect 1x3.5 smd: 1(0,2.54) 2(0,-2.464)
  silkscreen extent -3.3,-3.26 3.3,3.34
CASE-A_3216 [mil]
  rect 71.5x53.5 smd: 1(-69,1) 2(60,1)
  silkscreen extent -139,-39 107,40
E0515S-1WR3 [mm]
  round 1.6 hole 1: 1(-7.62,0) 2(-5.08,0) 5(2.54,0) 6(5.08,0) 7(7.62,0)
  silkscreen extent -9.8,-4.75 9.8,1.25
ESOP-8-EP [mm]
  rect 0.48x1.3 smd: 1(-1.905,-2.908) 2(-0.635,-2.908) 3(0.635,-2.908) 4(1.905,-2.908) 5(1.905,2.908) 6(0.635,2.908) 7(-0.635,2.908) 8(-1.905,2.908)
  rect 3.5x2.5 smd: 9(0,0)
  silkscreen extent -2.55,-2.05 2.55,2.05
G5NB-1A-E-DC5V [mm]
  round 2.3 hole 1.3: 1(-10.16,-2.159) 2(1.341,-2.159) 3(8.339,-2.159) 4(-10.16,2.54)
  silkscreen extent -11.16,-3.31 9.36,3.71
IND_0805 [mil]
  rrect50% 24x50 smd: 1(-36,0) 2(36,0)
  silkscreen extent -12,-24 12,24, body extent -39,-25 39,25, height 39
JQ1P-5V-F [mm]
  round 1.9 hole 1.4: 1(0,0) 2(0.003,7.617) 3(15.24,7.62) 4(10.163,-0.003) 5(17.78,0)
  silkscreen extent -1.4,-1.27 19.05,9.02
led3 [mil]
  round 60 hole 36: 1(-100,0) 2(100,0) 3(0,0)
  silkscreen extent -69,-69 69,69
LED-0603 [mil]
  rect 43x39 smd: 1(0,0) 2(67,0)
  silkscreen extent -36,-34 105,34, body extent -2,-16 62,16, height 24
LQFP-100_14X14X05P [mm]
  oval 1.8x0.28 smd: 1(-1.549,-1.551) 2(-1.549,-2.051) 3(-1.549,-2.551) 4(-1.549,-3.049) 5(-1.549,-3.549) 6(-1.549,-4.05) 7(-1.549,-4.55) 8(-1.549,-5.051) 9(-1.549,-5.551) 10(-1.549,-6.049) 11(-1.549,-6.549) 12(-1.549,-7.05) 13(-1.549,-7.55) 14(-1.549,-8.05) 15(-1.549,-8.551) 16(-1.549,-9.051) 17(-1.549,-9.549) 18(-1.549,-10.049) 19(-1.549,-10.55) 20(-1.549,-11.05) 21(-1.549,-11.55) 22(-1.549,-12.051) 23(-1.549,-12.551) 24(-1.549,-13.049) 25(-1.549,-13.549) 51(13.549,-13.549) 52(13.549,-13.049) 53(13.549,-12.551) 54(13.549,-12.051) 55(13.549,-11.55) 56(13.549,-11.05) 57(13.549,-10.55) 58(13.549,-10.049) 59(13.549,-9.549) 60(13.549,-9.051) 61(13.549,-8.551) 62(13.549,-8.05) 63(13.549,-7.55) 64(13.549,-7.05) 65(13.549,-6.549) 66(13.549,-6.049) 67(13.549,-5.551) 68(13.549,-5.051) 69(13.549,-4.55) 70(13.549,-4.05) 71(13.549,-3.549) 72(13.549,-3.049) 73(13.549,-2.551) 74(13.549,-2.051) 75(13.549,-1.551)
  oval 0.28x1.8 smd: 26(0.001,-15.099) 27(0.501,-15.099) 28(1.001,-15.099) 29(1.499,-15.099) 30(1.999,-15.099) 31(2.5,-15.099) 32(3,-15.099) 33(3.501,-15.099) 34(4.001,-15.099) 35(4.499,-15.099) 36(4.999,-15.099) 37(5.5,-15.099) 38(6,-15.099) 39(6.5,-15.099) 40(7.001,-15.099) 41(7.501,-15.099) 42(7.999,-15.099) 43(8.499,-15.099) 44(9,-15.099) 45(9.5,-15.099) 46(10,-15.099) 47(10.501,-15.099) 48(11.001,-15.099) 49(11.499,-15.099) 50(11.999,-15.099) 76(11.999,-0.001) 77(11.499,-0.001) 78(11.001,-0.001) 79(10.501,-0.001) 80(10,-0.001) 81(9.5,-0.001) 82(9,-0.001) 83(8.499,-0.001) 84(7.999,-0.001) 85(7.501,-0.001) 86(7.001,-0.001) 87(6.5,-0.001) 88(6,-0.001) 89(5.5,-0.001) 90(4.999,-0.001) 91(4.499,-0.001) 92(4.001,-0.001) 93(3.501,-0.001) 94(3,-0.001) 95(2.5,-0.001) 96(1.999,-0.001) 97(1.499,-0.001) 98(1.001,-0.001) 99(0.501,-0.001) 100(0.001,-0.001)
  silkscreen extent -2.05,-13.8 12.25,-0.75
OSC-YSX-3225_4P [mm]
  rect 1.15x1.4 smd: 1(-1.6,2.2) 2(-1.6,0) 3(0,0) 4(0,2.2)
  silkscreen extent -3.15,-1 0.9,3.2
PS-RES-9*4.7 [mil]
  round 60 hole 36: 1(-98.4,0) 2(98.4,0)
  silkscreen extent -177,-93 178,92
QFN-24_4X4X05P [mm]
  oval 0.8x0.28 smd: 1(-0.203,0.102) 2(-0.203,-0.399) 3(-0.203,-0.899) 4(-0.203,-1.397) 5(-0.203,-1.897) 6(-0.203,-2.398) 13(4.013,-2.388) 14(4.013,-1.887) 15(4.013,-1.387) 16(4.013,-0.889) 17(4.013,-0.389) 18(4.013,0.112)
  oval 0.28x0.8 smd: 7(0.66,-3.251) 8(1.161,-3.251) 9(1.661,-3.251) 10(2.159,-3.251) 11(2.659,-3.251) 12(3.16,-3.251) 19(3.175,0.991) 20(2.675,0.991) 21(2.174,0.991) 22(1.676,0.991) 23(1.176,0.991) 24(0.676,0.991)
  rect 2.68x2.68 smd: 25(1.905,-1.143)
  silkscreen extent -0.57,-3.29 4.06,1.01
RES_0805 [mil]
  rrect50% 24x50 smd: 1(-36,0) 2(36,0)
  silkscreen extent -12,-24 12,24, body extent -39,-25 39,25, height 24
RJ45 [mil]
  rect 51x59 hole 36: 1(175,-172) 2(125,-272) 3(75,-172) 4(25,-272) 5(-25,-172) 6(-75,-272) 7(-125,-172) 8(-175,-272)
  round 71 hole 40: 9(261,271) 10(161,271) 11(-161,271) 12(-261,271)
  round 98 hole 68: 13(305,-34) 14(-305,-34)
  round 79 hole 138: 15(-225,78) 16(225,78)
  silkscreen extent -313,-322 306,498
SC-70(SC-70-3) [mm]
  rect 0.6x1 smd: 1(-1.3,0) 2(0,0) 3(-0.635,1.905)
  silkscreen extent -1.65,0.07 0.35,1.57
SMA(DO-214AC) [mil]
  rect 50x57.9 smd: 1(-85,0) 2(77,0)
  silkscreen extent -82,-49 75,49
SMB(DO-214AA) [mil]
  rect 85x108 smd: 1(-90,0) 2(84,0)
  silkscreen extent -113,-70 107,70
SOD-123FL [mil]
  rect 35.8x48 smd: 1(64,0) 2(-64,0)
  silkscreen extent -53,-32 53,32
SOIC-8_150MIL [mm]
  oval 2.2x0.7 smd: 1(-0.635,0) 2(-0.635,-1.27) 3(-0.635,-2.54) 4(-0.635,-3.81) 5(5.41,-3.81) 6(5.41,-2.54) 7(5.41,-1.27) 8(5.41,0)
  silkscreen extent 0.01,-4.32 3.94,0.93
SOIC-16_300MIL [mm]
  oval 2.3x0.6 smd: 1(-9.652,8.89) 2(-9.652,7.62) 3(-9.652,6.35) 4(-9.652,5.08) 5(-9.652,3.81) 6(-9.652,2.54) 7(-9.652,1.27) 8(-9.652,0) 9(0.737,0) 10(0.737,1.27) 11(0.737,2.54) 12(0.737,3.81) 13(0.737,5.08) 14(0.737,6.35) 15(0.737,7.62) 16(0.737,8.89)
  silkscreen extent -8.18,-0.66 -0.66,9.55
SOP-14_208MIL [mm]
  oval 2.2x0.6 smd: 1(-0.001,0) 2(-0.001,-1.27) 3(-0.001,-2.54) 4(-0.001,-3.81) 5(-0.001,-5.08) 6(-0.001,-6.35) 7(-0.001,-7.62) 8(6.801,-7.62) 9(6.801,-6.35) 10(6.801,-5.08) 11(6.801,-3.81) 12(6.801,-2.54) 13(6.801,-1.27) 14(6.801,0)
  silkscreen extent -0.75,-8.91 5.3,1.29
SOT-23-5 [mm]
  rect 1.06x0.65 smd: 1(0,0) 2(0,-0.95) 3(0,-1.9) 4(2.2,-1.9) 5(2.2,0)
  silkscreen extent -0.45,-2.56 2,0.66
SOT-23-6 [mm]
  rect 1x0.55 smd: 1(0,0) 2(0,-0.95) 3(0,-1.9) 4(2.7,-1.9) 5(2.7,-0.95) 6(2.7,0)
  silkscreen extent 0.38,-2.51 2.36,0.69
TA1005-2M [mm]
  round 2 hole 1.2: 1(-6.604,7.112) 2(6.396,7.112) 3(6.396,-6.888) 4(-6.604,-6.888)
  silkscreen extent -8.7,-9.99 8.46,10.31
TLP187 [mm]
  rect 1.5x0.5 smd: 1(-3.5,1.27) 2(-3.5,-1.27) 3(3.5,-1.27) 4(3.5,1.27)
  silkscreen extent -3.56,-1.9 2.2,2.29, body extent -3.5,-1.93 3.5,1.93, height 2.1
tp [mm]
  round 1 smd: 1(0,0)
TSSOP-16 [mil]
  rect 71x16 smd: 1(-112,93) 2(-112,67) 3(-112,42) 4(-112,16) 5(-112,-10) 6(-112,-35) 7(-112,-61) 8(-112,-86) 9(116,-86) 10(116,-61) 11(116,-35) 12(116,-10) 13(116,16) 14(116,42) 15(116,67) 16(116,93)
  silkscreen extent -61,-103 65,110
WJ2EDGRC-5.08-10P [mm]
  round 3 hole 1.7: 1(-22.86,0) 2(-17.861,0) 3(-12.7,0) 4(-7.62,0) 5(-2.54,0) 6(2.54,0) 7(7.62,0) 8(12.7,0) 9(17.78,0) 10(22.86,0)
  silkscreen extent -25.4,-10.16 25.4,2.54
安装孔(3mm) [mm]
  round 1 hole 0.5: 0(-1.905,0) 0(-1.347,-1.347) 0(-1.347,1.347) 0(0,-1.905) 0(0,1.905) 0(1.347,-1.347) 0(1.347,1.347) 0(1.905,0)
  round 5 hole 3: 0(0,0)
  silkscreen extent -2.71,-2.71 2.68,2.7

## Part data
B1: BOM_LCSC=C70381, BOM_Manufacturer=Q&J, BOM_Manufacturer Part=CR1220-2, BOM_Supplier=LCSC, image=//image.lceda.cn/szlcsc/C70381.jpg, spicePre=B
C1 C3 C6 C7 C10 C13 C15 C16 C19 C21 C22 C23 C24 C25 C26 C43 C44 C45 C46 C47 C48 C49 C50 C51 C52 C53 C54 C55 C56 C57 C58 C59 C60: BOM_LCSC=C14663, BOM_LCSC Assembly=Yes, BOM_Manufacturer=YAGEO, BOM_Manufacturer Part=CC0603KRX7R9BB104, BOM_Supplier=LCSC, nameAlias=Capacitance, spicePre=C, spiceSymbolName=CC0603KRX7R9BB104
C2: BOM_LCSC=C87856, BOM_Manufacturer=HONOR, BOM_Manufacturer Part=RVT2A4R7M0605, BOM_Supplier=LCSC, nameAlias=Capacitance, spicePre=C, spiceSymbolName=RVT2A4R7M0605
C4: BOM_LCSC=C29823, BOM_LCSC Assembly=Yes, BOM_Manufacturer=FH, BOM_Manufacturer Part=1206B475K500NT, BOM_Supplier=LCSC, nameAlias=Capacitance, spicePre=C, spiceSymbolName=1206B475K500NT
C5: BOM_LCSC=C108718, BOM_Manufacturer=FH, BOM_Manufacturer Part=1206F226M100NT, BOM_Supplier=LCSC, Contributor=LCSC, nameAlias=Value, spicePre=C, spiceSymbolName=1206F226M100NT
C8 C9: BOM_LCSC=C53987, BOM_LCSC Assembly=Yes, BOM_Manufacturer=FH, BOM_Manufacturer Part=0603B472K500NT, BOM_Supplier=LCSC, nameAlias=Capacitance, spicePre=C, spiceSymbolName=0603B472K500NT
C11 C12 C14 C17 C18 C27: BOM_LCSC=C50254, BOM_LCSC Assembly=Yes, BOM_Manufacturer=SAMSUNG, BOM_Manufacturer Part=CL31B225KBHNNNE, BOM_Supplier=LCSC, nameAlias=Capacitance, spicePre=C, spiceSymbolName=CL31B225KBHNNNE
C20: BOM_LCSC=C1620, BOM_LCSC Assembly=Yes, BOM_Manufacturer=FH, BOM_Manufacturer Part=0603B471K500NT, BOM_Supplier=LCSC, nameAlias=Capacitance, spicePre=C, spiceSymbolName=0603B471K500NT
C28 C29 C30 C31 C33 C42: BOM_LCSC=C38523, BOM_LCSC Assembly=Yes, BOM_Manufacturer=SAMSUNG, BOM_Manufacturer Part=CL10C120JB8NNNC, BOM_Supplier=LCSC, nameAlias=Capacitance, spicePre=C, spiceSymbolName=CL10C120JB8NNNC
C32 C34 C35 C36 C37 C40 C41: library part Capacitor_ST, "Capacitor 0402 / 0603 / 0805", Revision="July-2002: Re-released for DXP Platform."
C38: library part Cap_10uF_POL_10%_TANA, "Polarized Capacitor,10uF,10V,10%,typeA,VISHAY", Manuf_1=VISHAY, Manuf_Part_1=293D106X9010A2TE3, ECCN_US/EU=n/a, Revision="July-2002: Re-released for DXP Platform."
C39: library part "CAP SMD 0603  X5R 1礔 25V 10%", "0603  X5R 1礔", Rated voltage=25V, Temperature Max=+125癈, Temperature Min=-55癈, Tolerance=10%, Order code Farnell=1288202RL, Technology=X5R
CN1: BOM_LCSC=C35897, BOM_Manufacturer=ReliaPro, BOM_Manufacturer Part=WJ142V-5.08-6P, BOM_Supplier=LCSC, image=//image.lceda.cn/szlcsc/C35897.jpg, spicePre=C
CN2: BOM_LCSC=C160127, BOM_Manufacturer=ReliaPro, BOM_Manufacturer Part=WJ15EDGRM-3.81-4P-14-00A, BOM_Supplier=LCSC, Contributor=LCSC, spicePre=C
CN3: BOM_LCSC=C28429, BOM_Manufacturer=ReliaPro, BOM_Manufacturer Part=WJ2EDGRC-5.08-10P, BOM_Supplier=LCSC, image=//image.lceda.cn/szlcsc/C28429.jpg, spicePre=C
D1: BOM_LCSC=C85098, BOM_Manufacturer=DIODES, BOM_Manufacturer Part=B340A-13-F, BOM_Supplier=LCSC, spicePre=D
D2 D13: BOM_LCSC=C22452, BOM_LCSC Assembly=Yes, BOM_Manufacturer=MDD, BOM_Manufacturer Part=SS54, BOM_Supplier=LCSC, image=//image.lceda.cn/szlcsc/C22452.jpg, spicePre=D
D3: BOM_LCSC=C113999, BOM_Manufacturer=MDD, BOM_Manufacturer Part=SMBJ30CA, BOM_Supplier=LCSC, spicePre=D
D4: BOM_LCSC=C57891, BOM_Manufacturer=LRC, BOM_Manufacturer Part=LBAT54CWT1G, BOM_Supplier=LCSC, image=//image.lceda.cn/szlcsc/C57891.jpg, spicePre=D
D5 D6 D7 D8: BOM_LCSC=C108803, BOM_Manufacturer=Jingdao, BOM_Manufacturer Part=1N4007W, BOM_Supplier=LCSC, spicePre=D
D9 D10 D11 D12: BOM_LCSC=C113979, BOM_Manufacturer=MDD, BOM_Manufacturer Part=SMBJ6.5CA, BOM_Supplier=LCSC, spicePre=D
F1: BOM_LCSC=C32404, BOM_Manufacturer=RUILON, BOM_Manufacturer Part=SMD1812P150TF/24, BOM_Supplier=LCSC, image=//image.lceda.cn/szlcsc/C32404.jpg, spicePre=F
J1 J2: BOM_LCSC=C48746, BOM_Manufacturer=OMRON, BOM_Manufacturer Part=G5NB-1A-E-DC5V, BOM_Supplier=LCSC, image=//image.lceda.cn/szlcsc/C48746.jpg, spicePre=J
K1 K2: BOM_LCSC=C58271, BOM_Manufacturer=PANASONIC, BOM_Manufacturer Part=JQ1P-5V-F, BOM_Supplier=LCSC, spicePre=K
L1 L3 L4: BOM_LCSC=C107345, BOM_Manufacturer=TDK, BOM_Manufacturer Part=VLP8040T-100M, BOM_Supplier=LCSC, nameAlias=Inductance, spicePre=L, spiceSymbolName=VLP8040T-100M
L2: BOM_LCSC=C98384, BOM_Manufacturer=Sunlord, BOM_Manufacturer Part=SPH252012H180MT, BOM_Supplier=LCSC, nameAlias=Inductance, spicePre=L, spiceSymbolName=SPH252012H180MT
L5: BOM_LCSC=C142057, BOM_Manufacturer=Chilisin, BOM_Manufacturer Part=PBY201209T-331Y-N, BOM_Supplier=LCSC, Contributor=LCSC, nameAlias=Value, spicePre=L, spiceSymbolName=PBY201209T-331Y-N
L6: BOM_LCSC=C128247, BOM_Manufacturer=TSFAR, BOM_Manufacturer Part=TA1005-2M, BOM_Supplier=LCSC, nameAlias=Value, spicePre=L, spiceSymbolName=TA1005-2M
LED1: BOM_LCSC=C72701, BOM_Manufacturer=KENTO, BOM_Manufacturer Part=3ARG9HWA(ºì´äÂ, BOM_Supplier=LCSC, spicePre=L
LED2 LED3 LED4 LED5 LED6 LED7 LED8 LED9: BOM_LCSC=C72043, BOM_LCSC Assembly=Yes, BOM_Manufacturer=EVERLIGHT, BOM_Manufacturer Part=19-217/GHC-YR1S2/3T, BOM_Supplier=LCSC, image=//image.lceda.cn/szlcsc/C72043.jpg, spicePre=L
P1: BOM_LCSC=C31597, BOM_Manufacturer=BOOMELE, BOM_Manufacturer Part=1.25T-4PWT, BOM_Supplier=LCSC, spicePre=X
P3: "Header, 5-Pin", LatestRevisionDate=17-Jul-2002, LatestRevisionNote="Re-released for DXP Platform.", Publisher="Altium Limited"
R1: BOM_LCSC=C25803, BOM_LCSC Assembly=Yes, BOM_Manufacturer=UniOhm, BOM_Manufacturer Part=0603WAF1003T5E, BOM_Supplier=LCSC, nameAlias=Value, spicePre=R, spiceSymbolName=0603WAF1003T5E
R2 R6 R10: BOM_LCSC=C4184, BOM_LCSC Assembly=Yes, BOM_Manufacturer=UniOhm, BOM_Manufacturer Part=0603WAF2002T5E, BOM_Supplier=LCSC, nameAlias=Value, spicePre=R, spiceSymbolName=0603WAF2002T5E
R3: BOM_LCSC=C26299, BOM_Manufacturer=RUILON, BOM_Manufacturer Part=07D330K, BOM_Supplier=LCSC, nameAlias=Value, spicePre=R, spiceSymbolName=07D330K
R4 R5: BOM_LCSC=C22809, BOM_LCSC Assembly=Yes, BOM_Manufacturer=UniOhm, BOM_Manufacturer Part=0603WAF1502T5E, BOM_Supplier=LCSC, nameAlias=Value, spicePre=R, spiceSymbolName=0603WAF1502T5E
R7: BOM_LCSC=C22797, BOM_LCSC Assembly=Yes, BOM_Manufacturer=UniOhm, BOM_Manufacturer Part=0603WAF1302T5E, BOM_Supplier=LCSC, nameAlias="Resistance (Ohms)", spicePre=R, spiceSymbolName=0603WAF1302T5E
R8 R9 R11 R12 R13 R14 R41 R42 R43 R44 R45 R46 R47 R49 R50 R51 R52 R54 R57 R58 R65 R66 R68 R69 R70 R71 R72 R73 R74 R75 R76 R77 R78 R79 R80 R81 R82 R83 R84 R85 R86 R87: BOM_LCSC=C21190, BOM_LCSC Assembly=Yes, BOM_Manufacturer=UniOhm, BOM_Manufacturer Part=0603WAF1001T5E, BOM_Supplier=LCSC, nameAlias=Value, spicePre=R, spiceSymbolName=0603WAF1001T5E
R15 R16 R20 R21: library part Res_50_1%_0603, "Resistor,50,0603,1%,YAGEO", Manuf_1=YAGEO, Manuf_Part_1=RC0402FR-0750RL, Distrib=FARNELL, ECCN_US/EU=n/a
R17 R18 R19 R24 R28 R30 R31 R32 R59: library part Resistor_ST, "Resistor 0402 / 0603 / 0805"
R22 R23 R26 R29: library part Res_33_1%_0402, "Resistor,33,0402,1%,YAGEO", Manuf_1=YAGEO, Manuf_Part_1=RC0402FR-0733RL, Distrib=FARNELL, ECCN_US/EU=n/a
R25: library part Res_12K1_1%_0603, "Resistor,12K1,0603,1%,VISHAY", Manuf_1=VISHAY, Manuf_Part_1="MCT 0603-50 1% P5 12K1", Distrib=FARNELL, ECCN_US/EU=n/a, Order=2325243
R27: library part Res_1K5_1%_0402, "Resistor,1K5,0402,1%,YAGEO", Manuf_1=YAGEO, Manuf_Part_1=RC0402FR-071K5L, Distrib=FARNELL, ECCN_US/EU=n/a, Order=RC0402FR-071K5L
R33 R34 R35 R36 R37 R38 R39 R40 R48 R53 R55 R56: BOM_LCSC=C23193, BOM_LCSC Assembly=Yes, BOM_Manufacturer=UniOhm, BOM_Manufacturer Part=0603WAF5100T5E, BOM_Supplier=LCSC, nameAlias=Value, spicePre=R, spiceSymbolName=0603WAF5100T5E
R67: library part Res_0805, "Resistor", Specification=±5%, Type=0805
RJ1: BOM_Manufacturer=LCSC, BOM_Manufacturer Part=RJ45, BOM_Supplier=LCSC, spicePre=R
SC1 SC2 SC3 SC4: library part Screw_M3, "Screw"
T1 T2 T3 T4 T5 T6: BOM_Manufacturer Part=?, spicePre=T
TV1: BOM_LCSC=C13612, BOM_Manufacturer=SEMTECH, BOM_Manufacturer Part=SRV05-4.TCT, BOM_Supplier=LCSC, image=//image.lceda.cn/szlcsc/C13612.jpg, spicePre=T
U2: BOM_LCSC=C131168, BOM_Manufacturer=MORNSUN, BOM_Manufacturer Part=B0503S-1WR3, BOM_Supplier=LCSC, spicePre=U
U3: BOM_LCSC=C131169, BOM_Manufacturer=MORNSUN, BOM_Manufacturer Part=E0515S-1WR3, BOM_Supplier=LCSC, spicePre=U
U4: BOM_LCSC=C6865, BOM_Manufacturer=EXAR, BOM_Manufacturer Part=SPX5205M5-L-5-0/TR, BOM_Supplier=LCSC, image=//image.lceda.cn/szlcsc/C6865.jpg, spicePre=U
u5: library part stm32f427
U6 U10 U11 U12 U13 U14 U21 U22: BOM_LCSC=C50180, BOM_Manufacturer=TOSHIBA, BOM_Manufacturer Part=TLP187(TPL,E(T, BOM_Supplier=LCSC, spicePre=U
U7: BOM_LCSC=C17353, BOM_Manufacturer=EPSON, BOM_Manufacturer Part=RX8025T-UB, BOM_Supplier=LCSC, image=//image.lceda.cn/szlcsc/C17353.jpg, spicePre=U
U8: BOM_LCSC=C30752, BOM_Manufacturer=ON, BOM_Manufacturer Part=CAT1025WI-30-GT3, BOM_Supplier=LCSC, image=//image.lceda.cn/szlcsc/C30752.jpg, spicePre=U
U9: library part LAN8742A-CZ-TR, "LAN8742A-CZ-TR - Small Footprint RMII 10/100 Ethernet, Transceiver with HP Auto-MDIX and flexPWR Technology SQFN-24", Manuf_1=MICROCHIP, Distrib=MICROCHIP, Manuf_Part_1=LAN8742A-CZ-TR, Order=LAN8742A-CZ-TR
U15: BOM_LCSC=C58052, BOM_Manufacturer=TI, BOM_Manufacturer Part=ADS1230IPWR, BOM_Supplier=LCSC, image=//image.lceda.cn/szlcsc/C58052.jpg, spicePre=U
U16: BOM_LCSC=C9637, BOM_LCSC Assembly=Yes, BOM_Manufacturer=ADI, BOM_Manufacturer Part=ADM2483BRWZ-REEL, BOM_Supplier=LCSC, image=//image.lceda.cn/szlcsc/C9637.jpg, spicePre=U
U18: BOM_LCSC=C18965, BOM_Manufacturer=ADI, BOM_Manufacturer Part=ADUM2401BRWZ-RL, BOM_Supplier=LCSC, image=//image.lceda.cn/szlcsc/C18965.jpg, spicePre=U
U19: BOM_LCSC=C16040, BOM_Manufacturer=MICROCHIP, BOM_Manufacturer Part=MCP4822-E/SN, BOM_Supplier=LCSC, spicePre=U
X1 X2: BOM_LCSC=C9006, BOM_LCSC Assembly=Yes, BOM_Manufacturer=YXC, BOM_Manufacturer Part=X322525MOB4SI, BOM_Supplier=LCSC, nameAlias=Frequency, spicePre=X, spiceSymbolName=X322525MOB4SI

## Via types
v1: diameter 24, hole 14, Top Layer to Bottom Layer, 67 vias
v2: diameter 30, hole 15, Top Layer to Bottom Layer, 41 vias
v3: diameter 50, hole 28, Top Layer to Bottom Layer, 20 vias
v4: diameter 23.62, hole 11.81, Top Layer to Bottom Layer, 5 vias
v5: diameter 40, hole 20, Top Layer to Bottom Layer, 2 vias
v6: diameter 60, hole 30, Top Layer to Bottom Layer, 1 vias
v7: diameter 48, hole 24, Top Layer to Bottom Layer, 1 vias
v8: diameter 78.74, hole 39.37, Top Layer to Bottom Layer, 1 vias

## Nets (pads, with @x,y where several pads share a name; then routed paths per layer and width w, separated by ;. In a path a pad name is that pad's centre, name@x,y a point inside that pad or via, vN(x,y) a via of type N, cw(c..) or ccw(c..) an arc to the next point about the centre after c; other vN are vias at no path point)
5V: C4.2 C5.2 C6.2 C7.2 D13.1 L1.2 R2.2 U2.2 U3.1 | length 5641.3
  Top Layer w10: R2.2@4334.4,-798.99 4424.73,-708.66 v1(4507.87,-708.66) ; 4492.01,-1665.35 4495.94,-1661.42 v1(4555.12,-1661.42)
  Top Layer w30: v2(1212.6,-2086.61) 1212.6,-1818.9 U2.2@1216.54,-1814.96
  Top Layer w39.37: 4133.86,-1579.4 4141.73,-1587.27 C7.2@4141.73,-1641.73 ; L1.2@4343.07,-1579.4 L1.2@4452,-1579.4 4492.01,-1619.41 4492.01,-1665.35 C5.2@4492.01,-1720.47 4492.01,-1856.57 4503.19,-1867.76 D13.1@4555.12,-1867.76
  Top Layer w50: U3.1@3870.08,-1982.68 3970.08,-1982.68 4031.5,-1921.26 4031.5,-1614.17 4066.27,-1579.4 4133.86,-1579.4 L1.2@4343.07,-1579.4
  Bottom Layer w10: v1(4507.87,-708.66) 4555.12,-708.66 v1(4555.12,-1661.42)
  Bottom Layer w30: v2(1212.6,-2086.61) 1255.91,-2129.92 2720.47,-2129.92 2787.4,-2062.99 3789.76,-2062.99 U3.1@3870.08,-1982.68
10Vout: C52.1 CN3.10 R70.2 u17.7 | length 740.3
  Top Layer w10: C52.1@2173.53,-361.1 2173.53,-302.85 2271.65,-204.72 CN3.10@2300.79,-204.72 2366.14,-270.08 2366.14,-359.89 ; R70.2@2404.3,-359.89 2366.14,-359.89 ; u17.7@2456.69,-579.92 2394.88,-579.92 2366.14,-551.18 2366.14,-359.89
10Vout2: C59.1 CN3.8 R80.2 u20.7 | length 965.5
  Top Layer w10: CN3.8@2700.79,-204.72 2711.99,-215.93 2711.99,-291.34 ; C59.1@2711.99,-361.1 2711.99,-291.34 ; u20.7@2929.13,-579.92 3022.44,-579.92 3066.93,-535.43 3066.93,-318.9 3043.31,-295.28 2940.94,-295.28 ; R80.2@2942.76,-359.89 2942.76,-297.09 2940.94,-295.28 ; 2711.99,-291.34 2715.93,-295.28 2940.94,-295.28
220_L: P3.2 P3.3
220_N: L6.1 P3.4
+3V3_PER: C10.2 C11.1 C21.2 C22.2 C23.2 C24.2 C25.2 C26.2 C27.2 C30.1 C35.2 C46.2 C56.2 D4.2 L2.2 L5.2 P1.1 R11.2 R12.2 R14.2 R17.1 R18.1 R19.1 R27.2 R28.1 R69.1 R78.1 T1.1 u5.11 u5.19 u5.22 u5.28 u5.50 u5.75 u5.100 U8.8 U9.9 U16.1 U18.1 | length 12113.6
  Top Layer w8: u5.22@1468.1,-1304.4 1540.62,-1304.4 1543.31,-1307.09
  Top Layer w10: U9.9@461.34,-1104.69 461.34,-1184.07 507.28,-1230 531.13,-1230 578.61,-1277.48 C35.2@578.61,-1335.39 540.46,-1335.39 531.5,-1344.35 531.5,-1393.7 526.81,-1398.39 R17.1@490.63,-1398.39 ; C21.2@1287.4,-843.73 1340.05,-843.73 1353.78,-830 1397.64,-830 ; C26.2@1350.39,-1425.2 1397.64,-1425.2 1449.94,-1477.5 1562.75,-1477.5 1567.31,-1472.93 1567.31,-1425.2 1567.7,-1425.2 u5.28@1568.5,-1424.4 1568.5,-1344.09 1543.31,-1318.9 1543.31,-1307.09 1543.31,-1255.91 1532.7,-1245.3 u5.19@1468.1,-1245.3 1383.1,-1245.3 C23.2@1370.08,-1232.28 ; u5.11@1468.1,-1087.8 1419.45,-1087.8 1397.64,-1065.99 1397.64,-830 ; u5.100@1529.1,-830 1397.64,-830 ; u5.50@2001.5,-1424.4 2001.5,-1513.32 C25.2@2011.8,-1523.62 2047.24,-1488.18 v2(2047.24,-1433.07) ; C22.2@2051.18,-732.29 2051.18,-795.28 2062.5,-806.59 u5.75@2062.5,-891 2128.61,-891 2139.4,-901.79 v2(2139.4,-980.32)
  Top Layer w20: L5.2@42.05,-960.63 -23.62,-960.63 -47.24,-984.25 -47.24,-1433.07 ; P1.1@121.95,-1835.32 -70.19,-1835.32 -90.55,-1814.96 -90.55,-1452.76 -70.87,-1433.07 -47.24,-1433.07 ; R18.1@226.7,-1398.39 226.7,-1474.73 232.28,-1480.32 ; R17.1@490.63,-1398.39 490.63,-1459.42 v2(489.42,-1460.63) 744.09,-1460.63 754.56,-1450.17 R19.1@754.56,-1398.39 ; v2(492.13,-1559.06) 492.13,-1594.49 ; R28.1@846.71,-1078.2 v2(936.47,-1078.2) ; R27.2@847.91,-1251.97 v2(929.13,-1251.97) ; L2.2@1078.74,-1696.85 1090.55,-1708.66 C11.1@1181.22,-1708.66 1181.22,-1622.17 C10.2@1177.16,-1618.11 v2(1177.16,-1563) 1091.2,-1563 1074.8,-1579.4 687.92,-1579.4 672.83,-1594.49 492.13,-1594.49 ; v2(1137.8,-984.25) 1106.3,-952.76 1106.3,-913.39 ; v2(1177.17,-1232.28) 1178.05,-1231.4 1369.2,-1231.4 C23.2@1370.08,-1232.28 ; R69.1@1259.84,-555.11 1141.73,-555.11 ; C21.2@1287.4,-843.73 1287.4,-905.39 1279.41,-913.39 1106.3,-913.39 ; U16.1@1378.4,-324.83 1261.77,-324.83 C46.2@1259.84,-326.76 1161.43,-326.76 1141.73,-346.46 1141.73,-555.11 ; v2(2248.02,-1031.69) R14.2@2248.02,-960.63 ; v2(2547.24,-956.69) C30.1@2598.42,-956.69 ; C30.1@2598.42,-956.69 U8.8@2598.43,-1044.49 2778.54,-1044.49 R12.2@2791.34,-1031.69 ; D4.2@2629.92,-1799.21 2633.86,-1803.15 v2(2677.17,-1803.15) 2732.28,-1803.15 T1.1@2736.22,-1807.09 ; v2(2677.17,-1350.39) C56.2@2751.97,-1350.39 2799.2,-1350.39 2810.63,-1361.81 U18.1@2870.53,-1361.81 ; v2(2679.92,-1625.98) R78.1@2751.97,-1625.98 ; -47.24,-1433.07 -47.24,-1460.63 -27.56,-1480.32 232.28,-1480.32 ; 232.28,-1480.32 346.46,-1594.49 492.13,-1594.49 ; 1106.3,-913.39 C27.2@1106.3,-853.99 1032.92,-853.99 996.06,-817.14 996.06,-641.73 1082.69,-555.11 1141.73,-555.11
  Bottom Layer w10: v2(2047.24,-1433.07) 2047.24,-1232.28 ; v2(2139.4,-980.32) 2188.98,-980.32 2208.66,-1000
  Bottom Layer w20: v2(489.42,-1460.63) 492.13,-1463.34 v2(492.13,-1559.06) ; v2(929.13,-1251.97) 1019.68,-1161.42 ; v2(936.47,-1078.2) 1019.68,-1161.42 ; v2(1137.8,-984.25) 1177.16,-1023.61 v2(1177.17,-1232.28) ; v2(1177.16,-1563) v2(1177.17,-1232.28) ; v2(2248.02,-1031.69) 2197.04,-1031.69 2196.85,-1031.5 ; v2(2547.24,-956.69) v2@2543.31,-960.63 ; v2(2677.17,-1803.15) v2(2677.17,-1350.39) 2677.17,-1003.94 2633.86,-960.63 v2@2543.31,-960.63 ; 1019.68,-1161.42 1090.55,-1232.28 v2(1177.17,-1232.28) ; v2(1177.17,-1232.28) 1178.05,-1231.4 2046.36,-1231.4 2047.24,-1232.28 2153.54,-1232.28 2196.85,-1188.98 2196.85,-1031.5 ; 2196.85,-1031.5 2196.85,-1011.81 2208.66,-1000 2248.03,-960.63 v2@2543.31,-960.63
+5: D12.2 D13.2 U6.4 U11.4 U12.4 U13.4 | length 2874.8
  Top Layer w15: v1(2389.76,-2448.82) 2409.45,-2429.13 U12.4@2443.7,-2429.13 ; U6.4@2612.99,-2429.13 2677.17,-2429.13 v1(2692.91,-2444.88) ; v1(3141.73,-2311.02) U13.4@3174.8,-2311.02 ; v1(3314.96,-2311.02) U11.4@3350.79,-2311.02
  Top Layer w59.06: v6(4149.61,-2314.96) 4539.37,-2314.96 4555.12,-2299.21 D13.2@4555.12,-2029.76 4529.3,-2003.94 D12.2@4410.77,-2003.94
  Bottom Layer w15: v1(2389.76,-2448.82) 2397.64,-2440.94 2437.01,-2440.94 ; v1(2692.91,-2444.88) v1@2704.72,-2444.88 ; v1@3137.8,-2314.96 v1(3141.73,-2311.02)
  Bottom Layer w59.06: 2437.01,-2440.94 v1@2692.91,-2440.94 ; 2704.72,-2440.94 2771.65,-2440.94 2897.64,-2314.96 3137.8,-2314.96 v6(4149.61,-2314.96)
+15: R9.2 T4.1 u17.8 u20.8 | length 2440.8
  Top Layer w15: T4.1@3440.94,-1284.7 3486.27,-1284.7 3504.84,-1303.27 R9.2@3564.3,-1303.27
  Top Layer w25: u17.8@2456.69,-529.92 v2(2456.69,-496.06) ; u20.8@2929.13,-529.92 3013.39,-529.92 v2(3019.69,-523.62) ; R9.2@3564.3,-1303.27 3641.61,-1303.27 v1(3641.73,-1303.15)
  Bottom Layer w25: v2(2456.69,-496.06) 2649.61,-496.06 2677.17,-523.62 2998.4,-523.62 ; 3000,-523.62 v2(3019.69,-523.62) 3649.61,-523.62 3791.34,-665.35 3791.34,-1157.48 3787.4,-1157.48 v1(3641.73,-1303.15)
-15: R8.2 T2.1 u17.4 u20.4 | length 3233.6
  Top Layer w15: u17.4@2218.69,-679.92 2292.52,-679.92 2303.15,-669.29 v2(2307.09,-669.29) ; u20.4@2691.13,-679.92 2768.9,-679.92 2779.53,-669.29 v2(2779.53,-657.48) ; T2.1@3464.57,-1850.39 3566.81,-1850.39 R8.2@3570.87,-1846.34
  Top Layer w30: R8.2@3570.87,-1846.34 3570.87,-1925.2 v2(3582.68,-1937.01)
  Bottom Layer w30: v2(2307.09,-669.29) 2307.09,-665.35 2318.9,-653.54 3713.85,-653.54 3738.22,-677.92 3738.22,-1143.67 3582.68,-1299.21 v2(3582.68,-1937.01) 3641.73,-1937.01
A5V: C18.2 C19.2 C43.2 C47.2 C48.1 C54.2 C55.2 R65.2 R79.1 T5.1 U4.5 U15.1 U15.10 U15.12 U16.16 U18.16 U19.1 | length 7532
  Top Layer w15: C48.1@295.28,-1688.97 346.44,-1688.97 375.5,-1718.02 U15.1@435.24,-1718.02 504.16,-1718.02 527.56,-1741.42 527.56,-1811.02 537.56,-1821.02 594.49,-1821.02 ; 603.92,-1872.02 U15.10@663.24,-1872.02 ; U15.12@663.24,-1821.02 594.49,-1821.02 ; R65.2@838.58,-1889.76 838.58,-1968.35 830.55,-1976.38 v2(779.53,-1976.38) 596.85,-1976.38 C54.2@594.49,-1978.74 594.49,-1881.46 594.49,-1821.02 ; U16.16@1787.4,-324.83 1844.52,-324.83 1870.08,-350.39 1940.94,-350.39 1964.57,-374.02 1964.57,-453.36 1943.1,-474.83 v2(1909.45,-474.83) 1909.45,-519.69 T5.1@1905.51,-523.62 ; v2(2933.07,-976.38) U19.1@2933.07,-1022.05 3010.24,-1022.05 3051.18,-1062.99 3051.18,-1248.03 3094.49,-1291.34 3290.71,-1291.34 ; v2(3190.97,-1872.02) 3356.32,-1872.02 3476.38,-1751.97 3476.38,-1590.55 ; R79.1@3417.32,-1594.48 3472.45,-1594.48 3476.38,-1590.55 ; U4.5@3484.26,-1189.56 3301.08,-1189.56 C19.2@3290.71,-1179.19 3290.71,-1291.34 ; 3290.71,-1291.34 3290.71,-1350.63 U18.16@3279.53,-1361.81 3366.77,-1361.81 3378.19,-1350.39 C55.2@3413.39,-1350.39 3456.69,-1350.39 3476.38,-1370.08 3476.38,-1590.55
  Bottom Layer w15: v2(779.53,-1976.38) 1417.32,-1976.38 1480.32,-2039.37 2640.13,-2039.37 2691.31,-1988.19 3074.8,-1988.19 v2(3190.97,-1872.02) ; v2(1909.45,-474.83) 1883.43,-474.83 1775.59,-582.68 1775.59,-807.09 1854.33,-885.83 2842.52,-885.83 v2(2933.07,-976.38)
ACOUT: J1.3 L6.2
AGND: C12.2 C13.1 C14.2 C15.1 C16.2 C17.2 C18.1 C19.1 C20.1 C43.1 C45.2 C47.1 C48.2 C49.2 C50.2 C51.2 C54.1 C55.1 C57.2 C58.2 CN3.7 CN3.9 R68.1 R72.1 R73.1 R82.1 R83.1 T3.1 U3.6 U4.2 U15.2 U15.3 U15.4 U15.9 U15.11 U15.13 U16.9 U16.15 U18.9 U18.15 U19.5 U19.7 | length 4653.4
  Top Layer w10: C12.2@3716.54,-1842.52 3716.54,-1921.26 T3.1@3720.47,-1925.2
  Top Layer w15: U16.9@1787.4,-674.83 1838.22,-674.83 1853.17,-659.88 v1(1853.17,-397.64) 1868.32,-412.79 C47.1@1909.45,-412.79 ; R73.1@2019.69,-361.1 v1(2019.68,-307.09) ; v1(2326.17,-307.09) 2326.17,-358.68 C50.2@2327.38,-359.89 ; CN3.9@2500.79,-204.72 2500.79,-291.34 2481.22,-310.9 R72.1@2481.22,-361.1 R83.1@2558.15,-361.1 ; C57.2@2865.84,-359.89 2869.17,-356.56 v1(2869.17,-325.86) ; R82.1@3019.68,-361.1 v1(3019.68,-322.83)
  Bottom Layer w15: v1(2019.68,-307.09) 2021.5,-308.9 2021.5,-393.7 ; 2326.17,-393.7 v1(2326.17,-307.09) ; 2484.25,-393.7 v1(2484.25,-307.09) ; 2870.53,-393.7 2870.53,-327.22 v1(2869.17,-325.86) 2869.17,-236.34 CN3.7@2900.79,-204.72 ; 3019.68,-393.7 v1(3019.68,-322.83)
  Bottom Layer w30: v1(1737.04,-374.83) 1755.91,-393.7 2021.5,-393.7 2326.17,-393.7 2484.25,-393.7 2870.53,-393.7 3019.69,-393.7 3625.98,-393.7 3838.58,-606.3 3838.58,-1180.49 3748.03,-1271.04 3748.03,-1452.76 3777.95,-1482.68 U3.6@3870.08,-1482.68
CLK: P1.3 u5.76 | length 2445.2
  Top Layer w10: P1.3@122.05,-1736.22 157.48,-1736.22 255.91,-1637.8 627.91,-1637.8 639.72,-1649.61 v2(649.61,-1649.61) ; v2(1059.06,-1264.4) v2(1216.53,-1264.4) ; v2(1618.11,-1271.65) 1618.11,-1027.44 1736.1,-909.45 1973.94,-909.45 2001.5,-881.89 u5.76@2001.5,-830
  Bottom Layer w10: v2(649.61,-1649.61) 649.61,-1647.59 1032.8,-1264.4 v2(1059.06,-1264.4) ; v2(1216.53,-1264.4) 1610.86,-1264.4 v2(1618.11,-1271.65)
COM1: CN1.5 K1.4 | length 942.4
  Top Layer w98.43: CN1.5@3851.18,-2944.88 3851.18,-2900.79 4026.67,-2725.3 K1.4@4205.61,-2725.3
  Bottom Layer w98.43: CN1.5@3851.18,-2944.88 3851.18,-2900.79 4026.67,-2725.3 K1.4@4205.61,-2725.3
COM2: CN1.3 K2.4 | length 537.6
  Top Layer w98.43: K2.4@3330.71,-2725.98 3451.18,-2846.46 CN1.3@3451.18,-2944.88
  Bottom Layer w98.43: K2.4@3330.71,-2725.98 3451.18,-2846.46 CN1.3@3451.18,-2944.88
COM3: CN1.2 J2.3 | length 2001
  Top Layer w98.43: J2.3@2769.24,-2730.67 2769.24,-2765.31 2850.39,-2846.46 2850.39,-3086.61 2917.32,-3153.54 3208.66,-3153.54 3247.98,-3114.22 CN1.2@3247.98,-2944.88
  Bottom Layer w98.43: J2.3@2769.24,-2730.67 2769.24,-2769.24 2850.39,-2850.39 2850.39,-3086.61 2917.32,-3153.54 3208.61,-3153.54 3247.98,-3114.17 CN1.2@3247.98,-2944.88
CS: R66.2 U18.12 U19.2 | length 3487.7
  Top Layer w10: R66.2@846.71,-1732.52 v1(895.12,-1732.52) ; U19.2@2933.07,-1072.05 2880.71,-1072.05 2840.27,-1112.49 2840.27,-1218.22 2956.69,-1334.65 2956.69,-1393.7 3124.8,-1561.81 3149.61,-1561.81 ; v1(3125.98,-1681.1) 3149.61,-1657.48 3149.61,-1561.81 ; U18.12@3279.53,-1561.81 3149.61,-1561.81
  Bottom Layer w10: v1(895.12,-1732.52) 895.12,-1820.31 957.48,-1882.68 3011.02,-1882.68 3125.98,-1767.72 v1(3125.98,-1681.1)
DIO: P1.4 u5.72 | length 2488.3
  Top Layer w10: P1.4@122.05,-1686.12 180.02,-1686.12 248.03,-1618.11 876.71,-1618.11 v2(888.52,-1629.92) ; v2(1110.24,-1307.09) 1212.6,-1307.09 v2(1216.54,-1311.02) ; v2(1700.79,-1287.4) 1700.79,-996.06 1746.85,-950 u5.72@2062.5,-950
  Bottom Layer w10: v2(888.52,-1629.92) 1110.24,-1408.2 v2(1110.24,-1307.09) ; v2(1216.54,-1311.02) 1677.17,-1311.02 v2(1700.79,-1287.4)
GND: B1.2 C10.1 C11.2 C21.1 C22.1 C23.1 C24.1 C25.1 C26.1 C27.1 C28.1 C29.1 C30.2 C31.2 C32.1 C33.1 C34.1 C35.1 C36.1 C37.1 C38.2 C39.2 C40.1 C41.1 C42.1 C46.1 C56.1 LED1.3 P1.2 R13.1 R24.2 R25.2 R30.2 R31.2 R32.2 R48.1 R53.1 R55.1 R56.1 R59.2 TV1.2 U2.3 u5.10 u5.20 u5.27 u5.74 u5.99 U7.11 U8.4 U9.25 U10.2 U14.2 U16.2 U16.8 U18.2 U18.8 U21.2 U22.2 X1.4 X2.4
  other v4: 508.69,-1058.87 434.96,-1057.04 508.69,-991.99 434.96,-990.66
  other v7: 649.61,-102.36
GRANG: P3.5